# EAGLE board Five42LightsEagle (EAGLE 6.4)
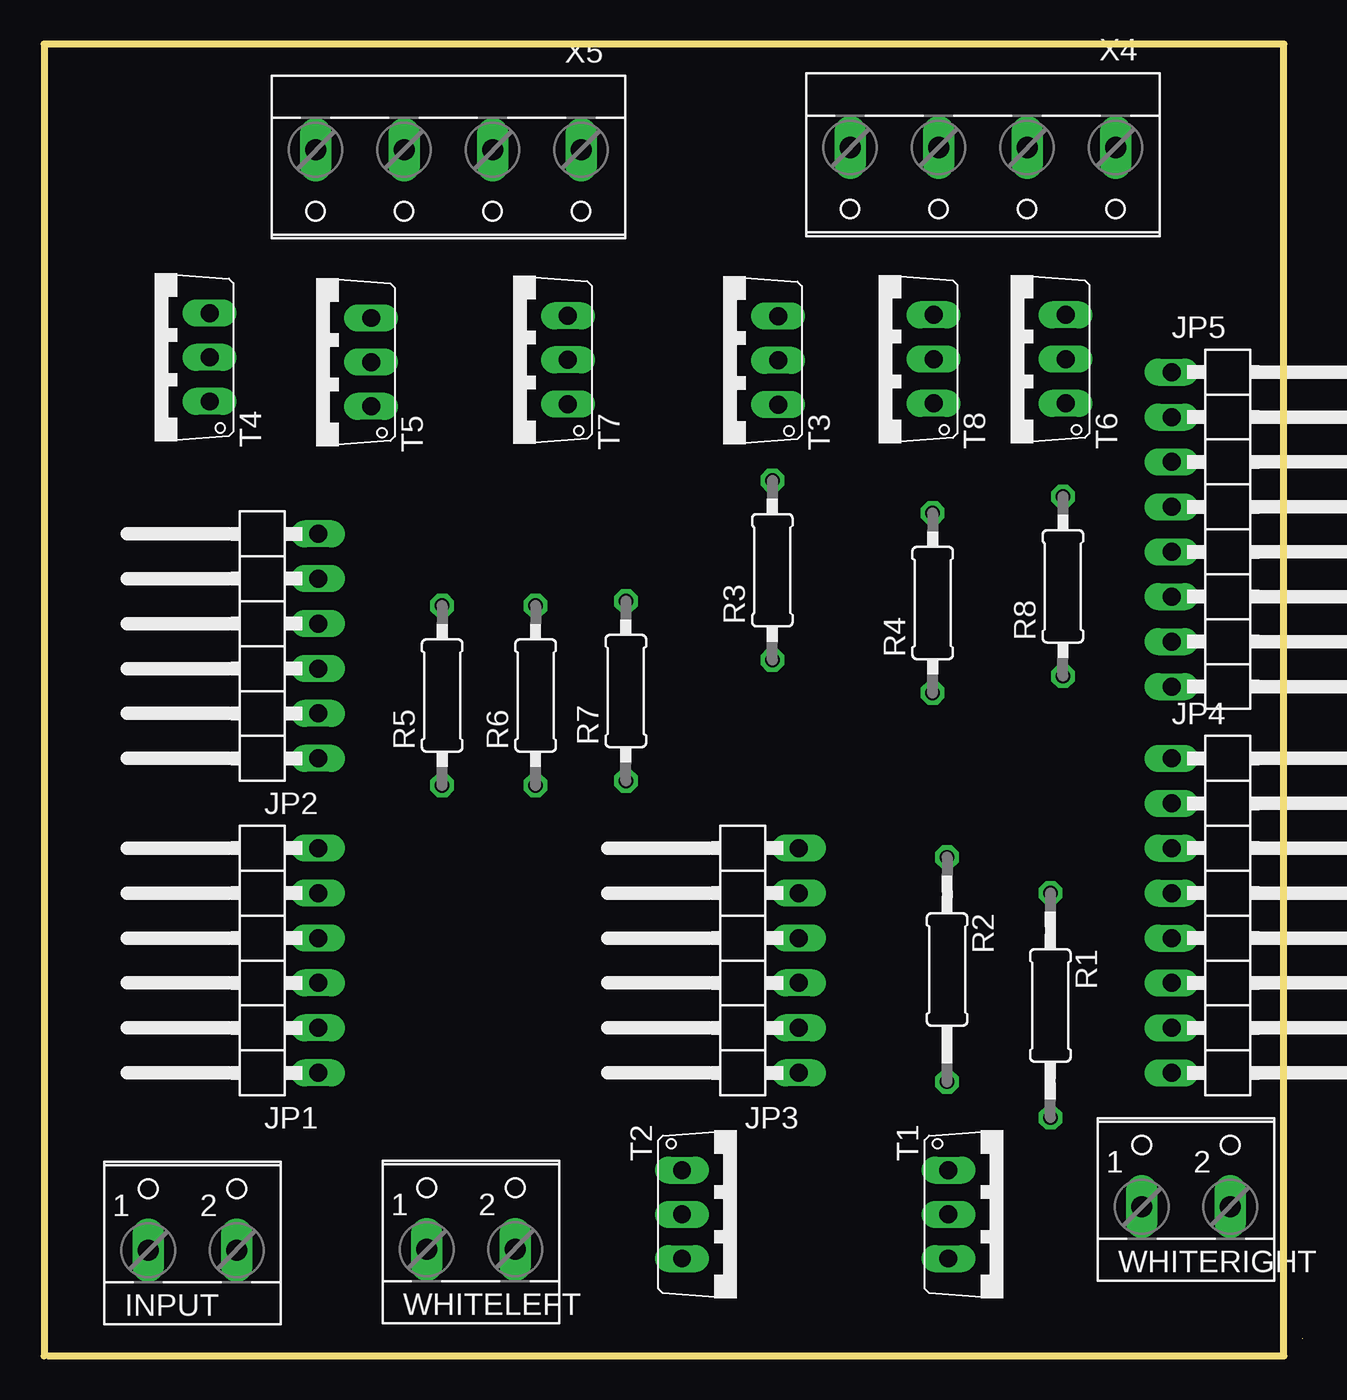
[diagram p0: board, top side]
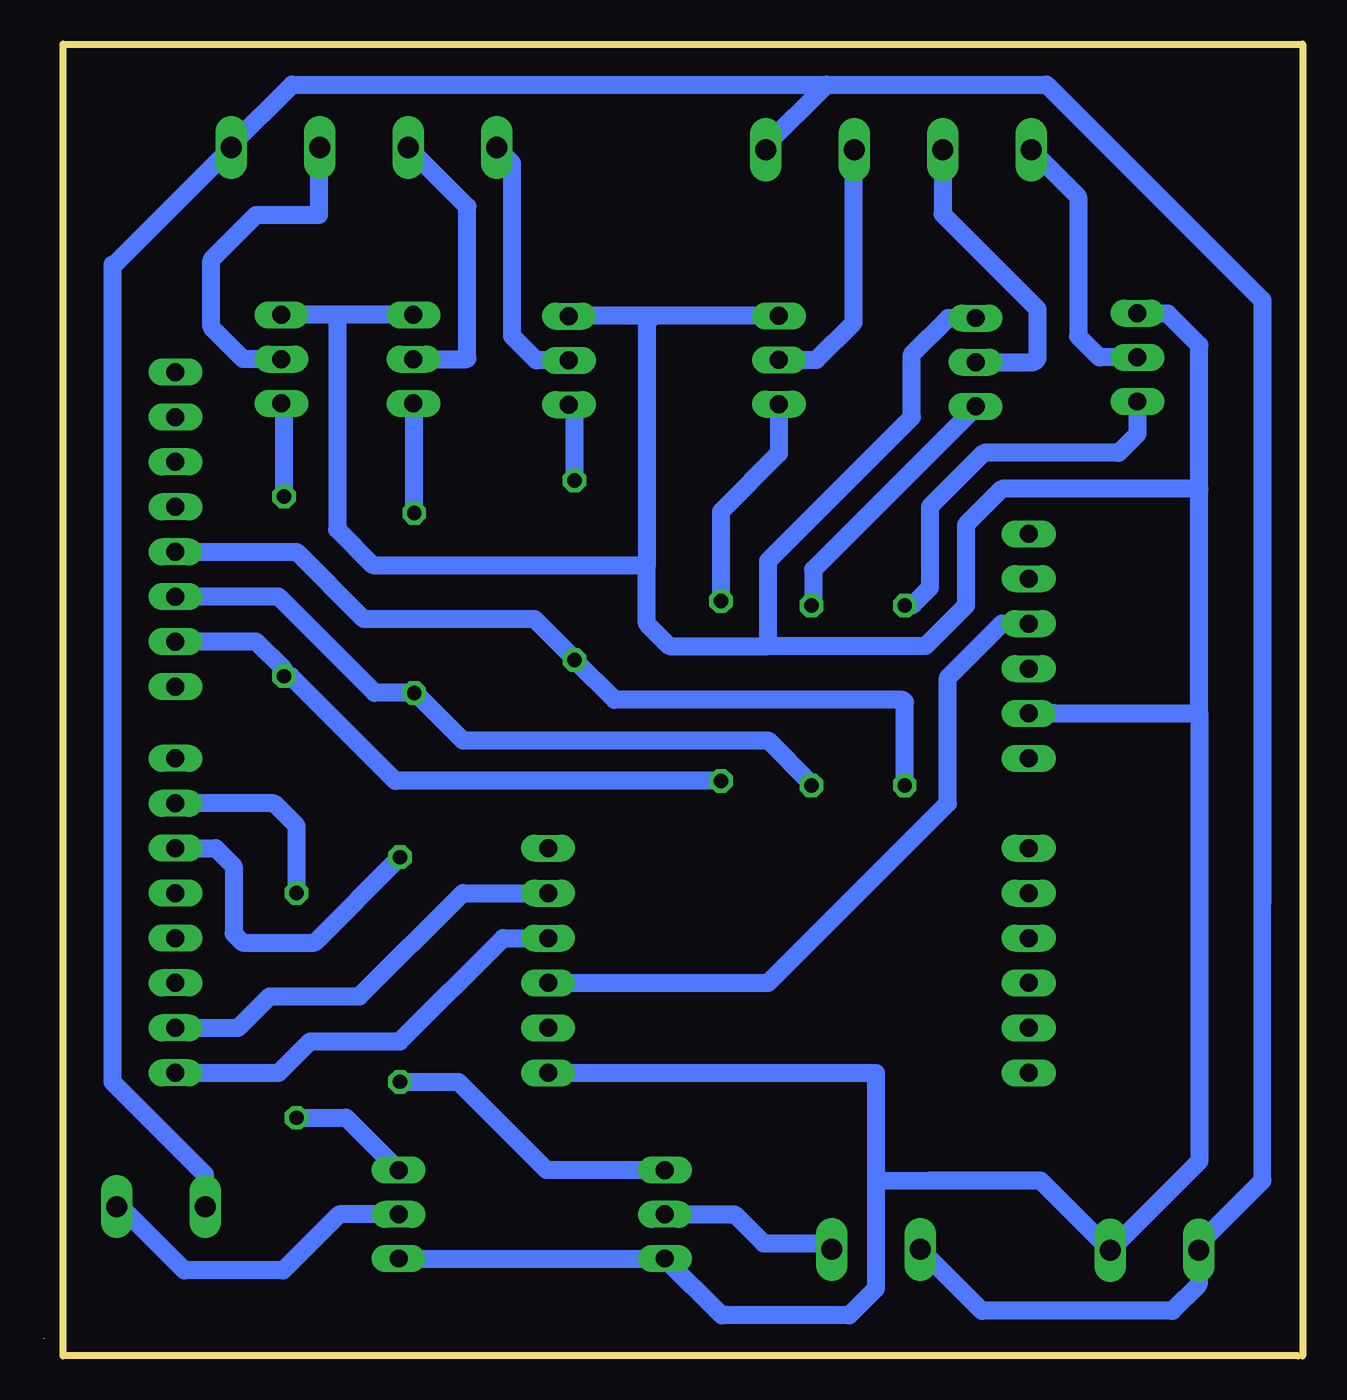
[diagram p1: board, bottom side, seen from below]

Size 71.17 x 74.17 mm. Coordinates in mm from the lower left corner, seen from the top.
Outline: 71.17,0.98 71.17,0.98
Outline: 0.25,0 70.1,0 70.1,74.17 0,74.17 0,0
Copper layers (1*16): Top 0.035mm / dielectric 0.79mm / Bottom 0.035mm
Design rules "Five42LightsEagle *": minimum track width 1mm, minimum drill 0.8mm, track to track 1mm, track to pad 1mm, pad to pad 0.355mm, via to via 0.355mm, smd to smd 0mil, copper to edge 10mil, drill to drill 1.25mm, minimum pad ring 0.256mm, minimum via ring 8mil, stop-mask expansion 0.1mm, vias tented up to drill 0mil, thermal gap 10mil

## Footprints (pad centres in the part's own frame; a part is rotated, then mirrored left to right if it is on the bottom)
W237-102 = drill 1.194 long: 1 -2.5,-1.27; 2 2.5,-1.27
1X06/90 = drill 1.016 long: 1 -6.35,-3.81; 2 -3.81,-3.81; 3 -1.27,-3.81; 4 1.27,-3.81; 5 3.81,-3.81; 6 6.35,-3.81
1X08/90 = drill 1.016 long: 1 -8.89,-3.81; 2 -6.35,-3.81; 3 -3.81,-3.81; 4 -1.27,-3.81; 5 1.27,-3.81; 6 3.81,-3.81; 7 6.35,-3.81; 8 8.89,-3.81
0207/12 = drill 0.813 octagon: 1 -6.35,0; 2 6.35,0
0207/10 = drill 0.813 octagon: 1 -5.08,0; 2 5.08,0
T-30_V = drill 1.016 long: 1 -2.5,-3.1; 2 0,-3.1; 3 2.5,-3.1
W237-4 = drill 1.194 long: 1 -7.5,-1.27; 2 -2.5,-1.27; 3 2.5,-1.27; 4 7.5,-1.27

## Placement (x,y rotation side)
INPUT  [W237-102]  8.38,7.24 0 top
JP1  [1X06/90]  11.68,22.35 90 top
JP2  [1X06/90]  11.68,40.13 90 top
JP3  [1X06/90]  38.86,22.35 90 top
JP4  [1X08/90]  67.56,24.89 270 top
JP5  [1X08/90]  67.56,46.74 270 top
R1  2.2k  [0207/12]  56.9,19.81 270 top
R2  2.2k  [0207/12]  51.05,21.84 270 top
R3  2.2k  [0207/10]  41.17,44.42 90 top
R4  2.2k  [0207/10]  50.24,42.57 90 top
R5  2.2k  [0207/10]  22.5,37.34 90 top
R6  2.2k  [0207/10]  27.79,37.34 90 top
R7  2.2k  [0207/10]  32.89,37.59 90 top
R8  2.2k  [0207/10]  57.61,43.51 90 top
T1  2SC1944  [T-30_V]  54.23,8 270 top
T2  2SC1944  [T-30_V]  39.17,8 270 top
T3  2SC1944  [T-30_V]  38.4,56.29 90 top
T4  2SC1944  [T-30_V]  6.25,56.46 90 top
T5  2SC1944  [T-30_V]  15.39,56.18 90 top
T6  2SC1944  [T-30_V]  54.66,56.36 90 top
T7  2SC1944  [T-30_V]  26.52,56.31 90 top
T8  2SC1944  [T-30_V]  47.19,56.36 90 top
WHITELEFT  [W237-102]  24.13,7.29 0 top
WHITERIGHT  [W237-102]  64.57,9.7 0 top
X4  [W237-4]  53.09,67.06 180 top
X5  [W237-4]  22.86,66.93 180 top

## Library data of the parts
INPUT WHITELEFT WHITERIGHT = con-wago-500; MPN: 237-102; OC_FARNELL: unknown; OC_NEWARK: 70K9898
JP1-JP5 = pinhead
R1-R8 = resistor
T1-T8 = transistor
X4 X5 = con-wago-500; OC_FARNELL: unknown; OC_NEWARK: unknown

## Nets
GND: INPUT.2 JP2.2 JP3.1 T1.3 T2.3 T3.3 T4.3 T5.3 T6.3 T7.3 T8.3
N$1: R2.2 T2.1
N$2: R1.2 T1.1
N$3: R3.2 T3.1
N$4: R4.2 T8.1
N$5: R8.2 T6.1
N$6: R7.2 T7.1
N$7: R6.2 T5.1
N$8: R5.2 T4.1
N$9: T1.2 WHITERIGHT.2
N$10: JP5.5 R3.1 R5.1
N$11: INPUT.1 WHITELEFT.1 WHITERIGHT.1 X4.1 X5.1
N$12: T2.2 WHITELEFT.2
N$13: T4.2 X5.4
N$14: JP5.6 R4.1 R6.1
N$15: JP5.7 R7.1 R8.1
N$16: T5.2 X5.3
N$17: T7.2 X5.2
N$18: JP4.3 R2.1
N$19: JP4.2 R1.1
N$20: T6.2 X4.2
N$21: T8.2 X4.3
N$22: T3.2 X4.4
N$23: JP2.4 JP3.3
N$24: JP3.4 JP4.8
N$25: JP3.5 JP4.7

## Tracks (layer width: path | path; a pad name or v marks a point on that pad's centre or on a via)
GND
  Bottom 1: 54.61,58.86 54.61,58.42 | 24.13,9.91 21.08,9.91
  Bottom 1.016: 13.97,36.32 JP2.2 5.84,36.32 | 5.84,49.02 5.84,57.15 7.62,58.93 9.31,58.93 T4.3 | 5.84,49.02 17.02,49.02 19.05,46.99 19.05,42.42 21.34,40.13 30.23,40.13 | 54.62,58.43 54.61,58.42 54.61,46.74 52.58,44.7 37.08,44.7 | 30.23,40.13 30.23,44.96 22.1,53.09 22.1,56.64 20.05,58.69 T5.3 | 30.23,40.13 35.81,40.13 37.08,41.4 37.08,44.7 | 5.84,36.32 5.84,49.02 | T3.3 41.48,58.81 T7.3 36.69,58.81 37.08,58.42 37.08,44.7 | T1.3 T2.3 32.85,2.29 25.65,2.29 24.13,3.81 24.13,9.91 24.13,16 JP3.1 | T8.3 54.61,58.86 T6.3 | 5.84,36.32 5.84,11.01 INPUT.2 14.82,9.91 21.08,9.91
N$1
  Bottom 1.016: T2.1 42.76,10.5 47.75,15.49 R2.2
N$2
  Bottom 1.016: R1.2 54.09,13.46 T1.1
N$3
  Bottom 1.016: R3.2 41.17,53.45 T3.1
N$4
  Bottom 1.016: R4.2 50.24,53.81 T8.1
N$5
  Bottom 1.016: R8.2 57.61,53.71 T6.1
N$6
  Bottom 1.016: R7.2 32.89,47.75 29.62,51.03 T7.1
N$7
  Bottom 1.016: R6.2 27.69,42.42 27.69,44.45 18.49,53.64 T5.1
N$8
  Bottom 1.016: T4.1 9.35,52.12 10.41,51.05 18.03,51.05 21.08,48.01 21.08,43.43 22.02,42.49 arc45 22.2,42.42 R5.2
N$9
  Bottom 1.016: WHITERIGHT.2 66.85,8.43 63.25,4.83 57.66,4.83 54.48,8 T1.2
N$10
  Bottom 1.016: R5.1 22.5,36.98 22.61,37.08 38.91,37.08 R3.1 41.17,39.4 43.43,41.66 53.09,41.66 56.9,45.47 JP5.5
N$11
  Bottom 1: 2.29,25.65 2.29,9.91
  Bottom 1.016: 26.92,71.88 57.15,71.88 60.59,68.45 X4.1 67.19,61.72 67.31,61.72 67.31,15.49 62.07,10.25 WHITERIGHT.1 | 2.29,25.65 2.29,59.69 14.48,71.88 26.92,71.88 | X5.1 30.36,68.45 26.92,71.88 | 2.29,9.91 5.88,6.31 INPUT.1 5.88,4.02 7.37,2.54 18.15,2.54 WHITELEFT.1
N$12
  Bottom 1.016: T2.2 32.13,8 30.48,6.35 26.96,6.35 WHITELEFT.2
N$13
  Bottom 1.016: T4.2 11.51,56.46 12.7,57.66 12.7,65.53 X5.4
N$14
  Bottom 1.016: R6.1 27.79,32.36 30.23,34.8 47.5,34.8 50.19,37.49 R4.1 52.48,37.49 57.91,42.93 JP5.6
N$15
  Bottom 1.016: JP5.7 59.18,40.39 57.61,38.81 R8.1 57.23,38.43 51.31,32.51 R7.1
N$16
  Bottom 1.016: X5.3 20.36,64.56 14.99,59.18 14.99,56.39 15.19,56.19 T5.2
N$17
  Bottom 1.016: X5.2 25.4,68.16 25.4,58.42 27.51,56.31 T7.2
N$18
  Bottom 1.016: JP4.3 61.47,28.7 60.45,27.69 60.45,23.88 59.94,23.37 55.88,23.37 R2.1
N$19
  Bottom 1.016: R1.1 56.9,29.97 58.17,31.24 JP4.2
N$20
  Bottom 1.016: X4.2 55.63,68.33 55.63,64.52 59.18,64.52 61.72,61.98 61.72,58.17 59.92,56.36 T6.2
N$21
  Bottom 1.016: X4.3 47.24,64.98 47.24,56.39 47.27,56.36 T8.2
N$22
  Bottom 1.016: X4.4 44.7,67.44 44.7,57.66 43.33,56.29 T3.2
N$23
  Bottom 1.016: JP2.4 17.02,41.4 20.07,38.35 20.07,31.24 30.23,21.08 JP3.3
N$24
  Bottom 1.016: JP4.8 57.91,16 56.13,17.78 51.05,17.78 45.21,23.62 JP3.4
N$25
  Bottom 1.016: JP4.7 60.2,18.54 58.42,20.32 53.34,20.32 47.5,26.16 JP3.5